# Altium PCB Rackmount_DSP.PcbDoc (part 16 of 24)
Units mil, origin at the board's own origin, x right, y up, seen from the top; angles counter-clockwise.
Board outline 10629.92 x 8267.72 mil, 4 copper layers (Top Layer, Mid Layer 1, Mid Layer 2, Bottom Layer), stack 36.2 mil thick; 4500 components, 1565 nets, 9765 pads, 3289 vias.
Unrouted connection lines stored in the file: 1.
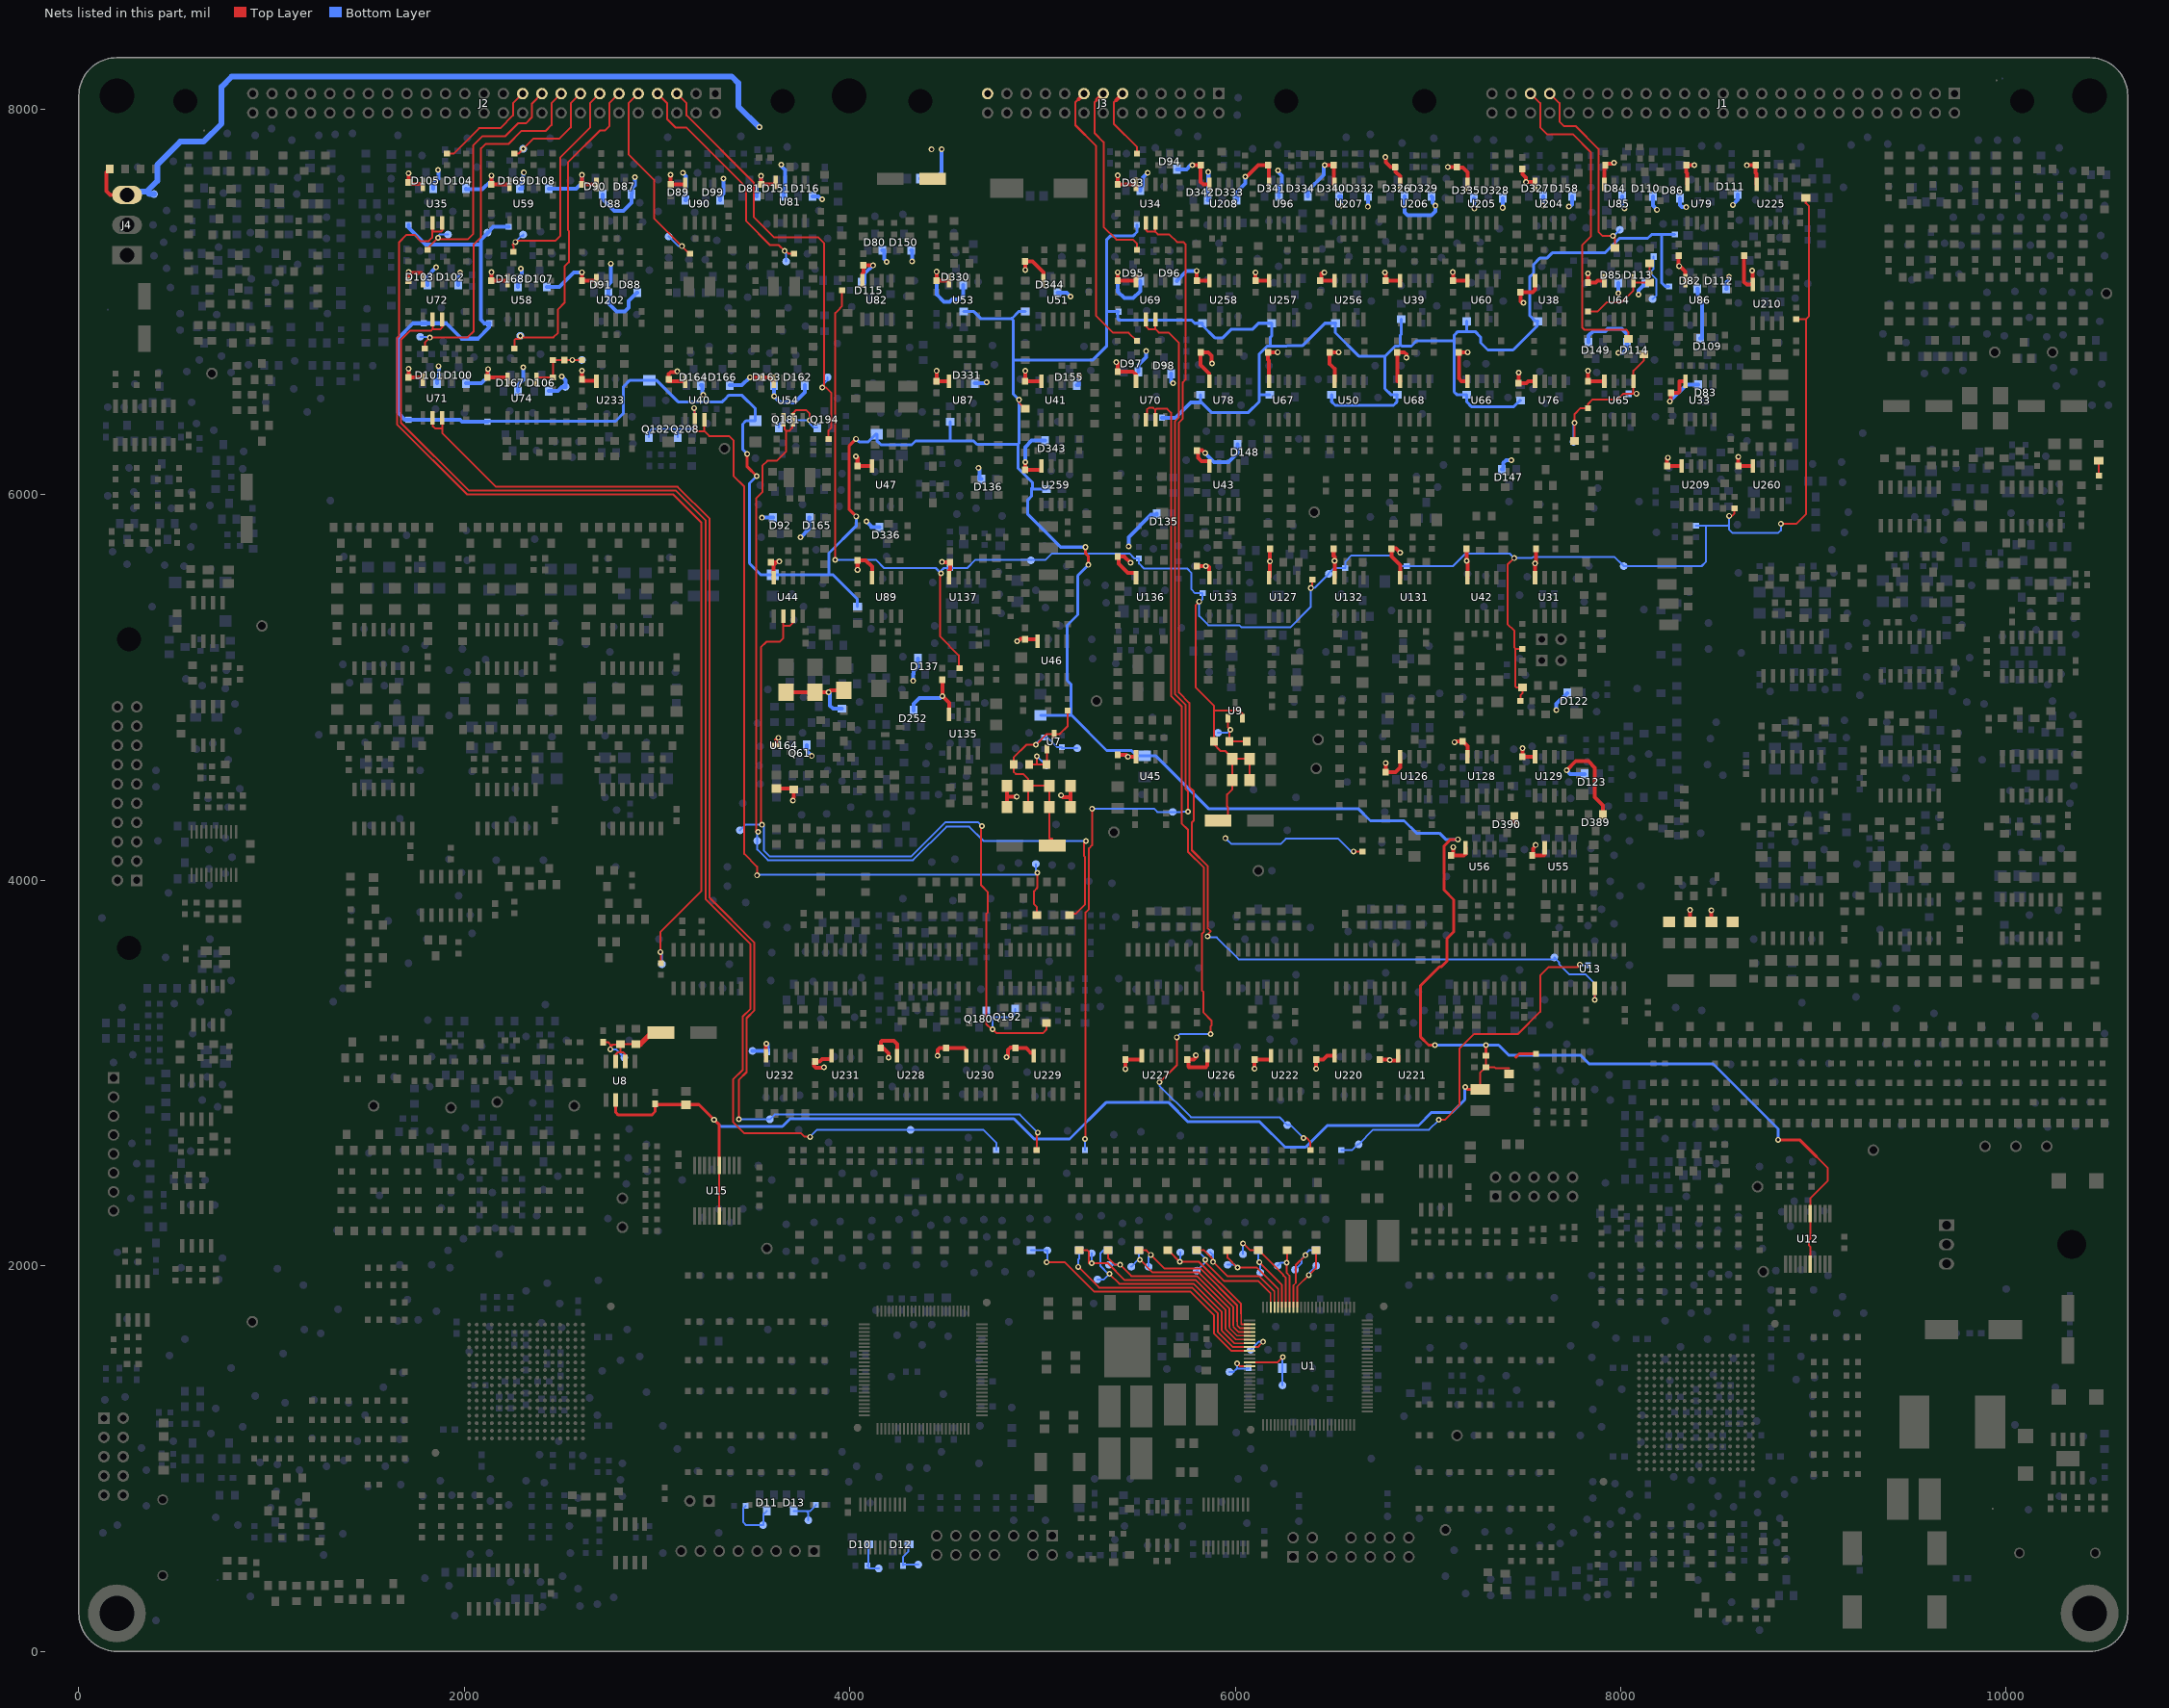
[diagram p18: the nets of this part, all layers, seen from the top]

## Via types
v1: diameter 30, hole 16, Top Layer to Bottom Layer, 3143 vias
v2: diameter 22, hole 12, Top Layer to Bottom Layer, 146 vias

## Nets (pads, with @x,y where several pads share a name; then routed paths per layer and width w, separated by ;. In a path a pad name is that pad's centre, name@x,y a point inside that pad or via, vN(x,y) a via of type N, cw(c..) or ccw(c..) an arc to the next point about the centre after c; other vN are vias at no path point) (continued)
VCC15-: C557.1 C559.1 C561.1 C584.1 C604.1 C606.1 C608.1 C611.1 C613.1 C615.1 C618.1 C623.1 C629.1 C631.1 C632.1 C634.1 C639.1 C640.1 C642.1 C648.1 C657.1 C659.1 C661.1 C663.1 C664.1 C665.1 C666.1 C671.1 C675.1 C676.1 C677.1 C678.1 C695.1 C707.1 C730.2 C734.1 C736.1 C738.1 C740.1 C743.1 C744.1 C745.1 C747.1 C778.2 C830.1 C881.1 C885.1 C917.2 C928.1 C941.1 C956.2 C972.1 C974.1 C976.1 C978.1 C980.1 C982.1 C984.1 C986.1 C988.1 C990.1 C992.1 C995.1 C997.1 C999.1 C1001.1 C1003.1 C1005.1 C1009.1 C1023.1 C1024.1 C1025.1 C1026.1 C1029.1 C1032.1 C1033.1 C1034.1 C1036.1 C1037.1 C1038.1 C1039.1 C1040.1 C1041.1 C1113.1 C1115.1 D80.1 D81.1 D82.1 D83.1 D84.1 D85.1 D86.1 D87.1 D88.1 D89.1 D90.1 D91.1 D92.1 D93.1 D94.1 D95.1 D96.1 D97.1 D98.1 D99.1 D100.1 D101.1 D102.1 D103.1 D104.1 D105.1 D106.1 D107.1 D108.1 D109.1 D110.1 D111.1 D112.1 D113.1 D114.1 D115.1 D116.1 D122.1 D123.1 D135.1 D136.1 D137.1 D147.1 D148.1 D149.1 D150.1 D151.1 D155.1 D158.1 D162.1 D163.1 D164.1 D165.1 D166.1 D167.1 D168.1 D169.1 D252.3 D326.1 D327.1 D328.1 D329.1 D330.1 D331.1 D332.1 D333.1 D334.1 D335.1 D336.1 D340.1 D341.1 D342.1 D343.1 D344.1 D389.1 D390.1 J3.25 J4.3 Q61.2 R963.1 R1107.2 R1108.2 R1109.2 R1110.2 R1280.2 R1404.2 R2088.2 R2094.2 R2095.2 R2096.2 R2097.2 TP1661.1 TP1677.1 TP1737.1 U31.4 U33.4 U34.4 U35.4 U38.4 U39.4 U40.4 U41.4 U42.4 U43.4 U44.4 U45.4 U46.4 U47.4 U50.4 U51.4 U53.4 U54.4 U55.4 U56.4 U58.4 U59.4 U60.4 U64.4 U65.4 U66.4 U67.4 U68.4 U69.4 U70.4 U71.4 U72.4 U74.4 U76.4 U78.4 U79.4 U81.4 U82.4 U85.4 U86.4 U87.4 U88.4 U89.4 U90.4 U96.4 U126.4 U127.4 U128.4 U129.4 U131.4 U132.4 U133.4 U135.4 U136.4 U137.4 U164.3 U202.4 U204.4 U205.4 U206.4 U207.4 U208.4 U209.4 U210.4 U220.4 U221.4 U222.4 U225.4 U226.4 U227.4 U228.4 U229.4 U230.4 U231.4 U232.4 U233.4 U256.4 U257.4 U258.4 U259.4 U260.4 | length 28457.2
  Top Layer w10: v1(7965,7722.73) v1@7968.79,7722.73
  Top Layer w20: R1404.2@160,7690 143.8,7673.8 143.8,7575.47 163.36,7555.91 J4.3@250,7555.91 ; v1(1710,6653.43) C606.1@1710,6610 1785,6610 U71.4@1785,6600 ; C557.1@1710,7110 v1@1710,7150 ; v1(1710,7154.83) v1@1710,7150 ; v1(1710,7668.03) C992.1@1710,7620 1710,7612.5 1785,7612.5 U35.4@1785,7610 ; U72.4@1785,7110 1785,7141.66 1776.66,7150 v1@1710,7150 ; v1(2122.67,6652.69) 2120,6650.02 C941.1@2120,6610 2225,6610 U74.4@2225,6600 ; v1(2140,7154.99) C559.1@2140,7110 U58.4@2225,7110 ; v1(2140,7656.27) C974.1@2140,7610 U59.4@2235,7610 ; v1(2610,6644.3) C561.1@2610,6600 2610,6592.5 2685,6592.5 U233.4@2685,6590 ; v1(2610,7154.6) C995.1@2610,7110 U202.4@2685,7110 ; v1(2610,7659.69) C744.1@2610,7610 U88.4@2685,7610 ; v1(3070,7660.5) C740.1@3070,7610 U90.4@3145,7610 ; v1(3104.84,6640.61) 3101.53,6637.31 3071.65,6637.31 3060,6625.65 C976.1@3060,6600 3060,6590 U40.4@3145,6590 ; v1(3481.29,6610) C988.1@3540,6610 3605,6610 U54.4@3605,6590 ; v1(3540,7654.58) C978.1@3540,7610 3615,7610 U81.4@3615,7620 ; U232.4@3565,3090 3565,3145 3572.5,3152.5 3566.96,3152.5 3566.86,3152.6 v1(3566.62,3152.6) ; C747.1@3590,5650 v1@3620,5650 ; U44.4@3605,5570 3605,5635 v1@3620,5650 ; U164.3@3617.51,4700 3617.51,4727.23 v1(3629.89,4739.61) ; C830.1@3620,4475 3709.85,4475 3709.85,4470 R963.1@3710,4470 3710,4430 3707.28,4427.28 3707.28,4426.11 3705.94,4424.77 3705.94,4415.2 3704.98,4414.24 v1(3704.98,4413.48) ; v1(3633.98,5653.98) 3623.98,5653.98 v1@3620,5650 ; R2088.2@3670,4975 C917.2@3820,4975 v1(3890,4975) 3900,4985 C956.2@3970,4985 ; v1(3865.35,3030.43) 3863.13,3028.21 3824.54,3028.21 3814.52,3038.23 3814.52,3054.44 3820,3059.92 C642.1@3820,3060 3843.5,3060 3856.81,3073.31 3905,3073.31 U231.4@3905,3090 ; v1(4031.76,6199.79) 4040,6191.55 C615.1@4040,6150 U47.4@4115,6150 ; v1(4040,5611.11) C1023.1@4040,5660 4082.17,5660 4115,5627.17 U89.4@4115,5570 ; U82.4@4065,7110 4065,7147.5 4070,7152.5 C736.1@4070,7190 v1(4119.98,7190) ; v1(4201.01,3079.63) 4201.01,3102.52 4173.53,3130 C1036.1@4160,3130 4160,3161.38 4166.86,3168.24 4227.78,3168.24 4245,3151.02 U228.4@4245,3090 ; v1(4450,6643.17) C980.1@4450,6590 U87.4@4515,6590 ; v1(4450,7157.73) C1032.1@4450,7110 U53.4@4515,7110 ; v1(4454.62,3089.99) 4455.45,3089.99 4455.45,3119.34 4466.11,3130 C1039.1@4500,3130 4500.69,3129.31 4592.81,3129.31 4605,3117.12 U230.4@4605,3090 ; v1(4478.45,5651.41) 4479.85,5650 C613.1@4520,5650 4520,5612.5 4515,5607.5 U137.4@4515,5570 ; C1038.1@4480,5040 v1(4480,4954.99) 4515,4919.99 U135.4@4515,4860 ; v1(4813.59,3082.88) 4821.64,3082.88 4821.64,3119.53 4834.18,3132.08 4860,3132.08 C984.1@4860,3130 4915,3130 4938.67,3106.33 4955,3106.33 U229.4@4955,3090 ; R1109.2@4815,4380 4815,4434.01 ; R1110.2@4815,4490 4815,4434.01 ; v1(4866.59,4434.01) 4815,4434.01 ; v1(4867.41,5240.83) 4872.33,5240.83 4885.31,5253.81 4910,5253.81 C618.1@4910,5250 4975,5250 U46.4@4975,5240 ; v1(4909.9,6169.81) 4910,6169.81 C1034.1@4910,6130 4995,6130 U259.4@4995,6150 ; v1(4910,6643.19) C695.1@4910,6590 U41.4@4995,6590 ; v1(4910,7166.99) C1033.1@4910,7210 4948.22,7210 5005,7153.22 U51.4@5005,7110 ; v1(5096.26,4441.42) 5105.32,4432.36 5145,4432.36 ; R1108.2@5145,4380 5145,4432.36 ; R1107.2@5145,4490 5145,4432.36 ; v1(5382.37,6688.08) 5390,6680.45 C1026.1@5390,6640 5468.53,6640 5485,6623.53 U70.4@5485,6590 ; C611.1@5390,4650 5434.75,4650 v1(5443.23,4641.52) 5444.75,4640 U45.4@5485,4640 ; C1041.1@5390,5680 C1041.1@5396,5680 ; v1(5390,7154.25) C997.1@5390,7110 U69.4@5485,7110 ; v1(5390,7656.95) C734.1@5390,7610 U34.4@5485,7610 ; v1(5430,3021.02) C1009.1@5430,3070 5514.71,3070 5514.71,3090 U227.4@5515,3090 ; v1(5456.39,5647.84) 5426,5678.24 5426,5680 C1041.1@5396,5680 ; U136.4@5485,5570 5485,5595 5442.97,5595 5396,5641.97 C1041.1@5396,5680 ; C629.1@5750,3070 C629.1@5756,3070 ; v1(5777.26,7710) C639.1@5820,7710 5820,7623.5 5833.5,7610 U208.4@5865,7610 ; v1(5795.37,3092.3) 5798.89,3088.78 5798.89,3085.05 5783.84,3070 C629.1@5756,3070 ; C1005.1@5800,5630 v1(5846.58,5630) 5860,5630 5865,5625 U133.4@5865,5570 ; v1(5800,7161.99) C745.1@5800,7110 U258.4@5865,7110 ; v1(5843.23,6217.29) 5841.21,6217.29 5825.88,6232.62 5806,6232.62 C584.1@5806,6230 ; U226.4@5855,3090 5855,3039.03 5846.15,3030.18 5760.73,3030.18 5756,3034.91 C629.1@5756,3070 ; U43.4@5865,6150 5865,6175 5823.5,6175 5806,6192.5 C584.1@5806,6222.5 ; U78.4@5865,6590 5865,6627.89 5820,6672.89 C678.1@5820,6740 5859.3,6740 5877.15,6722.15 5877.15,6687.14 5879.16,6685.13 v1(5879.16,6681.51) ; v1(6051.81,7649.84) 6059.84,7649.84 6120,7710 C657.1@6170,7710 6175,7710 U96.4@6175,7610 ; v1(6100,3023.39) C1037.1@6100,3070 6185,3070 U222.4@6185,3090 ; v1(6105.08,7153.44) C661.1@6105.08,7110 U257.4@6175,7110 ; U127.4@6175,5570 6180,5575 v1(6180,5655.54) C675.1@6180,5720 ; U67.4@6175,6590 6175,6697.5 6170,6702.5 C659.1@6170,6740 6219.86,6740 v1(6220.19,6739.67) ; v1(6420,3022.13) C743.1@6420,3070 6456,3070 6476,3090 U220.4@6515,3090 ; C640.1@6440,7110 C640.1@6447.5,7110 ; v1(6462.47,7152.82) 6452.82,7152.82 6447.5,7147.5 C640.1@6447.5,7110 ; v1(6463.82,7710.94) 6464.76,7710 C623.1@6510,7710 6511.66,7710 6511.66,7610 U207.4@6515,7610 ; C1001.1@6510,5720 6510,5682.5 6515,5677.5 v1(6515,5656.89) U132.4@6515,5570 ; U50.4@6515,6590 6515,6653.95 6490,6678.95 C999.1@6490,6740 6490,6740.09 v1(6536.09,6740.09) ; U256.4@6515,7110 C640.1@6447.5,7110 ; C990.1@6750,3070 6795.93,3070 v1@6800.59,3065.34 ; v1(6775.58,7153.04) 6780,7148.62 C1003.1@6780,7110 U39.4@6855,7110 ; v1(6778.59,7752.02) 6780.23,7752.02 6780.23,7726.25 6806.48,7700 C1025.1@6830,7700 6831.78,7698.22 6831.78,7676.57 6855,7653.35 U206.4@6855,7610 ; v1(6780,4609.26) C648.1@6780,4560 6830,4560 6855,4585 U126.4@6855,4640 ; v1(6802.01,3067.76) 6802.01,3065.34 v1@6800.59,3065.34 ; U221.4@6845,3090 6845,3065 6800.93,3065 v1@6800.59,3065.34 ; U131.4@6855,5570 6855,5634.61 6850.48,5639.13 6850.48,5640.15 6810,5680.63 C972.1@6810,5720 6810,5721.98 6833.31,5721.98 v1(6855.05,5700.24) ; U68.4@6855,6590 6840.3,6590 6840.3,6700.66 6840,6700.96 C986.1@6840,6740 6876,6740 6887.48,6728.52 v1(6887.48,6712.12) ; v1(7102.29,7700) C982.1@7150,7700 7150,7697.04 7180.86,7697.04 7205,7672.91 U205.4@7205,7610 ; C885.1@7120,4130 7120,4137.5 C885.1@7131.24,4137.5 ; v1(7127.72,7155) 7127.72,7149.78 7130,7147.5 C1024.1@7130,7110 U60.4@7205,7110 ; v1(7130.96,4172.61) 7131.24,4172.33 C885.1@7131.24,4137.5 ; v1(7137,4717) 7140,4720 C676.1@7180,4720 7205,4695 U128.4@7205,4640 ; U56.4@7195,4170 7195,4136.76 7186.23,4127.99 7131.24,4127.99 C885.1@7131.24,4137.5 ; C608.1@7200,5720 v1(7200,5657.41) 7205,5652.41 U42.4@7205,5570 ; U66.4@7205,6590 7173.5,6590 7160,6603.5 C634.1@7160,6740 v1(7205.53,6740) ; D390.1@7447.5,4331.5 7447.5,4299.02 7457.92,4288.6 v1(7457.92,4282.94) ; v1(7470,6634.33) C707.1@7470,6580 7509.75,6580 7519.75,6590 U76.4@7555,6590 ; v1(7490,4685.13) C1029.1@7490,4640 U129.4@7555,4640 ; C928.1@7490,7690 7490,7661.78 7507.01,7644.77 7507.01,7621.99 v1(7508.66,7621.99) 7555,7621.99 U204.4@7555,7610 ; v1(7495,6995.61) 7487.25,6995.61 7480,7002.85 C671.1@7480,7050 7541.98,7050 7555,7063.02 U38.4@7555,7110 ; C1113.1@7540,4130 C1113.1@7544.29,4130 ; U31.4@7555,5570 v1(7555,5644.27) 7560,5644.27 C632.1@7560,5720 ; v1(7558.63,4183.09) 7552.81,4177.27 7552.81,4172.91 7544.29,4164.39 C1113.1@7544.29,4130 ; U55.4@7605,4170 7605,4133.99 7601.01,4130 C1113.1@7544.29,4130 ; v1(7719.09,4570.5) 7766.25,4617.67 7831.71,4617.67 7864.97,4584.4 7864.97,4432.43 7907.5,4389.9 D389.1@7907.5,4341.5 ; v1(7830,6642.85) C677.1@7830,6590 U65.4@7915,6590 ; v1(7830,7148.94) C666.1@7830,7100 7869.75,7100 7879.75,7110 U64.4@7915,7110 ; U85.4@7915,7610 7915,7690.3 7920,7695.3 C664.1@7920,7710 7920,7717.5 7963.56,7717.5 v1@7968.79,7722.73 ; v1(8244.93,6193.04) 8240,6188.11 C604.1@8240,6150 U209.4@8315,6150 ; v1(8254.86,6485.38) 8260,6490.52 C663.1@8260,6530 8296,6530 8303.5,6537.5 8303.5,6590 U33.4@8335,6590 ; C665.1@8300,7240 8300,7190.01 v1(8302.97,7187.04) 8305.83,7187.04 8335,7157.86 U86.4@8335,7110 ; U79.4@8345,7610 8345,7667.5 8340,7672.5 C738.1@8340,7710 v1(8382.08,7710) ; R2095.2@8360,3785 v1(8360,3845.65) ; R2096.2@8470,3785 v1(8470,3843.69) ; v1(8610,6197.23) C1040.1@8610,6150 U260.4@8685,6150 ; C1115.1@8640,7240 8640,7103.5 8653.5,7090 U210.4@8685,7090 8685,7161.22 v1(8682.19,7164.03) ; v1(8654.21,7709.3) 8653.51,7710 C881.1@8700,7710 8700,7670 8705,7665 U225.4@8705,7610 ; C584.1@5806,6222.5 C584.1@5806,6230 ; C584.1@5806,6222.5 5800,6222.5 C584.1@5800,6230 C584.1@5806,6230
  Bottom Layer w10: v1(5859.58,7674.7) v1@5860.66,7674.7 ; v1(6687.5,7494.89) 6683.63,7498.75 v1@6687.5,7498.75
  Bottom Layer w20: D103.1@1807.5,7088.5 1807.5,7133.78 v1(1853.91,7180.2) ; D105.1@1837.5,7588.5 1837.5,7612.22 1865.51,7640.23 1865.51,7684.98 v1(1864.19,7684.98) ; D101.1@1857.5,6578.5 1857.5,6596.13 1869.11,6607.74 1869.11,6667.48 v1(1865.56,6667.48) ; D102.1@1967.5,7088.5 1967.5,7137.22 1970,7139.72 1970,7145.14 v1(1977.66,7152.8) ; D100.1@2007.5,6578.5 2089.34,6578.5 2122.67,6611.83 v1(2122.67,6652.69) ; D104.1@2007.5,7588.5 2007.5,7584.78 2093.66,7584.78 2140,7631.12 v1(2140,7656.27) ; D167.1@2277.5,6538.5 2277.5,6570.05 2305,6597.55 v1(2305,6662.15) ; D168.1@2277.5,7078.5 2277.5,7121.28 2298.86,7142.64 2298.86,7166.07 2294.66,7166.07 2294.66,7172.95 v1(2293.34,7172.95) ; D169.1@2287.5,7588.5 2300.4,7588.5 2300.4,7632 2305.41,7637.01 2305.41,7672.01 v1(2309.24,7672.01) ; D107.1@2427.5,7078.5 2492.27,7078.5 2568.38,7154.6 v1(2610,7154.6) ; D106.1@2437.5,6538.5 2484.51,6538.5 2505.3,6559.29 2505.3,6560 TP1737.1@2525,6560 2525,6595.06 v1(2505.3,6614.76) ; D108.1@2437.5,7588.5 2581.04,7588.5 2610,7617.46 v1(2610,7659.69) ; D90.1@2717.5,7558.5 2717.5,7533.31 2778,7472.81 2825.31,7472.81 2867.5,7515 D87.1@2867.5,7558.5 2867.5,7559.97 2870.18,7562.65 2870.18,7589.29 2885.58,7604.69 v1(2885.58,7647.69) ; v1(2759.97,7199.62) 2759.97,7102.8 2747.5,7090.33 D91.1@2747.5,7048.5 2747.5,6993.65 2789.77,6951.38 2832.44,6951.38 2852.95,6971.88 2852.95,7005.48 2895.97,7048.5 D88.1@2897.5,7048.5 ; v1(3133.52,7670.13) 3150,7653.64 3150,7528.5 D89.1@3147.5,7528.5 ; D164.1@3227.5,6568.5 3234.14,6568.5 3234.14,6525 v1@3239.27,6519.87 ; D99.1@3327.5,7528.5 3327.5,7546.18 3343.96,7562.64 v1(3343.96,7640) ; D166.1@3377.5,6568.5 3439.46,6568.5 3480.96,6610 v1(3481.29,6610) ; TP1661.1@3495,3115 3565,3115 C631.1@3570,3110 3570,3114.83 3573.25,3118.09 3573.25,3149 3570.46,3149 3566.86,3152.6 v1(3566.62,3152.6) ; D81.1@3517.5,7548.5 3517.5,7594.54 3540,7617.04 v1(3540,7654.58) ; v1(3544.89,5881.5) D92.1@3602.5,5881.5 ; D163.1@3607.5,6568.5 v1(3607.5,6512.14) 3639.97,6479.67 3714.65,6479.67 3767.5,6532.52 D162.1@3767.5,6568.5 ; v1(3643.81,7713.1) 3641.57,7710.86 3641.57,7710 3641.57,7707.58 3663.66,7685.49 3663.66,7585.31 3657.5,7579.16 D151.1@3657.5,7548.5 ; v1(3743.43,5779.27) 3743.43,5778.19 3789.93,5824.69 3789.93,5881.5 D165.1@3792.5,5881.5 ; Q61.2@3777.5,4701.5 3777.5,4671.45 3802.5,4646.45 v1(3802.5,4644.9) ; D116.1@3807.5,7548.5 3835.64,7548.5 3851.36,7532.79 v1(3856.2,7532.79) ; v1(3890,4975) 3896.92,4968.08 3896.92,4905.79 3912.72,4890 R1280.2@3960,4890 ; D115.1@4062.5,7101.5 4074.98,7101.5 4074.98,7145 v1(4119.98,7190) ; v1(4085.73,5862.26) 4110.48,5837.51 4110.48,5833.52 4112.5,5831.5 D336.1@4152.5,5831.5 ; D80.1@4167.5,7268.5 4177.5,7268.5 4177.5,7222.76 v1(4191.47,7208.8) ; D150.1@4317.5,7268.5 4323.02,7268.5 4323.02,7211.34 v1(4322.33,7211.34) ; v1(4328.89,5034.69) 4328.89,5069.69 4330.71,5071.5 4330.71,5086.21 4352.5,5108 D137.1@4352.5,5151.5 ; D252.3@4330,4881.5 4330,4916.04 4360.4,4946.45 4469.21,4946.45 4477.76,4954.99 v1(4480,4954.99) ; C730.2@4365,7640 4444.72,7640 4476.78,7672.07 v1(4476.78,7792.29) ; v1(4450,7157.73) 4450,7039.8 4489.19,7000.62 4518.18,7000.62 4531.62,7014.06 4568.58,7014.06 4587.5,7032.97 D330.1@4587.5,7088.5 ; D331.1@4647.5,6578.5 4703.49,6578.5 v1(4709.78,6584.79) ; v1(4667.14,6139.86) 4666.86,6139.86 4666.58,6139.58 4663.65,6139.58 4672.5,6130.73 4672.5,6081.5 D136.1@4682.5,6081.5 ; v1(4909.9,6169.81) 4910,6169.91 4910,6247.66 4943.5,6281.16 5012.5,6281.16 D343.1@5012.5,6281.5 ; D344.1@5077.5,7048.5 5124.82,7048.5 v1(5145.18,7028.14) ; D155.1@5177.5,6568.5 5187.5,6568.5 5187.5,6614.12 v1(5190.66,6617.29) ; v1(5390,7154.25) 5390,7054.68 5424.3,7020.38 5470.97,7020.38 5507.5,7056.91 D95.1@5507.5,7108.5 ; v1(5446.16,5732.9) 5446.16,5779.66 5563.05,5896.56 5592.5,5896.56 D135.1@5592.5,5901.5 ; D97.1@5497.5,6638.5 5497.5,6674.03 5537.28,6713.81 v1(5537.28,6745.3) ; D93.1@5507.5,7578.5 5507.5,7591.46 5520.78,7604.74 5520.78,7645.25 v1(5545.53,7670) ; D98.1@5667.5,6628.5 5667.5,6585 5673.99,6578.51 v1(5677.62,6578.51) ; D96.1@5697.5,7108.5 5697.5,7112 5747.49,7161.99 v1(5800,7161.99) ; D94.1@5697.5,7688.5 5746.35,7688.5 5767.85,7710 v1(5777.26,7710) ; v1(5843.23,6217.29) 5867.97,6192.54 5867.97,6191.24 5889.22,6170 5964.5,6170 6012.5,6218 D148.1@6012.5,6261.5 ; D342.1@5857.5,7528.5 5860.66,7528.5 v1@5860.66,7674.7 ; D333.1@6007.5,7528.5 6009.07,7528.5 6009.07,7571.58 6051.81,7614.33 v1(6051.81,7649.84) ; v1(6221.57,7683) 6221.57,7675.98 6241.36,7656.19 6241.36,7611.08 6227.5,7597.22 D341.1@6227.5,7548.5 ; D334.1@6377.5,7548.5 6377.5,7577.34 6459.41,7659.25 6459.41,7700.87 6463.82,7705.29 v1(6463.82,7710.94) ; D340.1@6537.5,7548.5 6547.5,7548.5 6547.5,7501.86 v1(6549.4,7499.96) ; v1@6687.5,7498.75 D332.1@6687.5,7548.5 ; D326.1@6877.5,7548.5 6877.5,7466.13 6892.31,7451.32 7018.41,7451.32 7038.12,7471.03 v1(7038.12,7499.54) 7022.63,7515.03 7022.63,7543.37 D329.1@7017.5,7548.5 ; D335.1@7237.5,7538.5 7237.5,7487.98 v1(7241.05,7484.43) ; D147.1@7382.5,6131.5 7391.25,6131.5 7391.25,6165.74 7405.52,6180 v1(7431.89,6180) ; v1(7386.7,7489.4) 7384.7,7487.41 7384.7,7491.58 7387.5,7494.38 D328.1@7387.5,7538.5 ; D327.1@7597.5,7548.5 7597.5,7500.18 v1(7597.81,7499.87) ; v1(7666.2,4883.19) 7666.2,4915.2 D122.1@7722.5,4971.5 ; v1(7719.09,4570.5) 7738.09,4551.5 D123.1@7812.5,4551.5 ; v1(7731.1,7495.48) 7737.98,7495.48 7747.5,7505 D158.1@7747.5,7548.5 ; D149.1@7832.5,6791.5 7832.5,6825.41 7856.68,6849.59 7919.66,6849.59 7932.25,6862.18 8005.32,6862.18 8032.5,6835 D114.1@8032.5,6791.5 8032.5,6758.09 8011.49,6737.08 v1(7987.14,6737.08) ; v1(7987.5,7046.11) D85.1@7987.5,7098.5 ; D84.1@8007.5,7548.5 8007.5,7496.97 v1(8018.63,7485.84) ; v1(8092.66,7039.11) 8092.66,7060.16 8127.5,7095 D113.1@8127.5,7098.5 ; D110.1@8167.5,7548.5 8167.5,7499.94 v1(8188.19,7479.25) ; v1(8254.86,6485.38) 8340.98,6571.5 D83.1@8402.5,6571.5 ; D86.1@8307.5,7538.5 8307.5,7502.5 8317.94,7492.06 v1(8340.03,7492.06) ; D82.1@8397.5,7068.5 8398.33,7068.5 8398.33,7031.36 8412.77,7016.92 v1(8412.77,7015.57) 8422.5,7005.84 8422.5,6811.5 D109.1@8412.5,6811.5 ; D112.1@8547.5,7068.5 8550.2,7068.5 8550.2,7103.49 8561,7114.29 v1(8561,7130.55) ; v1(8580.97,7504.35) 8607.5,7530.88 D111.1@8607.5,7558.5 ; v1@3239.27,6519.87 3239.99,6519.87 v1(3240.11,6519.76) 3239.38,6519.76 v1@3239.27,6519.87
  Bottom Layer w30: J4.3@250,7555.91 250,7574.02 352.5,7574.02 ; TP1677.1@390,7560 366.52,7560 352.5,7574.02 ; v1(3530.62,7908.27) 3527.98,7908.27 3421.19,8015.06 3421.19,8136.32 3387.77,8169.74 838.9,8169.74 838.64,8170 793.04,8170 740.11,8117.07 740.11,7925.09 646.92,7831.91 525.93,7831.91 406.55,7712.52 406.55,7628.07 352.5,7574.02
  other v1: 4424.3,7791.86
VCHG+: J1.43 R799.1 TP812.1 | length 1058.3
  Top Layer w10: J1.43@7631.5,8081.5 7681.5,8031.5 7681.5,7936.24 7704.11,7913.63 7764.94,7913.63 7884.09,7794.47 7884.09,7363.91 7904.52,7343.49 v1(7958.99,7343.49) 7970,7332.48 R799.1@7970,7280
  Bottom Layer w10: v1(7958.99,7343.49) 7961.42,7345.92 7965.92,7345.92 TP812.1@7995,7375
VCHG-: J1.45 R836.1 TP813.1 | length 1727.4
  Top Layer w10: J1.45@7531.5,8081.5 7581.5,8031.5 7581.5,7906.45 7617.31,7870.64 7751.36,7870.64 7844.09,7777.9 7844.09,7340.45 7799,7295.35 7799,6868.79 7811.62,6856.17 8027.91,6856.17 8039.08,6845 8039.08,6810 R836.1@8040,6810
  Bottom Layer w10: TP813.1@7530,8080 J1.45@7531.5,8081.5
VIN_A: TP403.1 U13.13 U34.6 U34.7 | length 6281.5
  Top Layer w10: U34.6@5535,7410 5535,7375.29 5544.84,7365.44 5585,7365.44 ; U34.7@5585,7410 5585,7365.44 ; v1(5856,3708.95) 5856,3718.95 5872.21,3735.17 5857.5,3749.88 5857.5,4073.62 5774.44,4156.68 5774.44,4299.17 5784.44,4309.17 5784.44,4461.08 5761.31,4484.21 5761.31,4920.45 5707.45,4974.31 5707.45,6374.6 5727.62,6394.76 5727.62,6583.55 5741,6596.93 5741,7300.55 5730.38,7311.17 5697.46,7311.17 5656.76,7351.87 5597.43,7351.87 5585,7364.3 5585,7365.44 ; U13.13@7865,3440 7865,3379.75 v1(7865.4,3379.75)
  Bottom Layer w10: v1(5856,3708.95) 5859.95,3708.95 5865.14,3703.77 5903.41,3703.77 6017.06,3590.11 7655,3590.11 TP403.1@7655,3600 7679.75,3575.25 7679.75,3564.94 7733.2,3511.5 7818,3511.5 7865.4,3464.1 v1(7865.4,3379.75)
VIN_A/ADREF: R903.1 R926.2 TP1608.1 | length 1962.6
  Top Layer w10: v1(7056.39,2757.61) 7086.39,2757.61 7162.75,2833.98 7162.75,2970.93 7162.66,2971.02 7162.66,3125.5 7240.33,3203.17 7467.88,3203.17 7582.41,3317.69 7582.41,3505.17 7627.24,3550 7776.79,3550 7786.75,3559.96 v1(7786.75,3562.99)
  Bottom Layer w10: R903.1@6550,2600 6604.43,2600 6634.43,2630 TP1608.1@6640,2630 6715.8,2705.8 7004.57,2705.8 v1(7056.39,2757.61) ; v1(7786.75,3562.99) 7789.75,3560 R926.2@7830,3560
VIN_B: R907.1 TP401.1 U69.6 U69.7 | length 5054.6
  Top Layer w10: v1(5220.78,2658.14) 5222.74,2658.14 5222.74,3833.16 5240.22,3850.63 5240.22,4165.37 5256.72,4181.87 v1(5256.72,4371.48) ; U69.6@5535,6910 5535,6875.41 5550.81,6859.6 5585,6859.6 5585,6860 ; U69.7@5585,6910 5585,6860 ; v1(5754.44,4356.01) 5754.44,4462.8 5741.31,4475.93 5741.31,4911.5 5687.45,4965.36 5687.45,6382.88 5707.62,6403.05 5707.62,6787.59 5653.34,6841.87 5603.13,6841.87 5585,6860
  Bottom Layer w10: R907.1@5220,2600 5220,2657.36 v1(5220.78,2658.14) ; v1(5256.72,4371.48) 5579.24,4371.48 5595.71,4355 TP401.1@5675,4355 5723.43,4355 5724.44,4356.01 v1(5754.44,4356.01)
VIN_C: R929.2 TP400.1 U70.6 U70.7 | length 4995.8
  Top Layer w10: U70.6@5535,6390 5541.5,6390 5541.5,6442.05 5550.98,6451.54 5573.46,6451.54 5585,6440 ; U70.7@5585,6390 5585,6440 ; v1(5606.05,2952.96) 5608.57,2952.96 5695.85,3040.25 v1(5695.85,3185.86) ; v1(5872.13,3201.88) 5872.13,3242.97 5876.73,3247.57 5876.73,3272.43 5835.14,3314.02 5835.14,3420.17 5826,3429.31 5826,3721.83 5837.5,3733.33 5837.5,4065.33 5754.44,4148.39 5754.44,4262.33 5721.31,4295.46 5721.31,4903.21 5666.5,4958.02 5666.5,6426.21 5646.86,6445.86 5590.86,6445.86 5585,6440 ; v1(6353.39,2663.25) 6369.2,2663.25 6390,2642.45 R929.2@6390,2600
  Bottom Layer w10: v1(5606.05,2952.96) 5606.05,2934.72 5769.86,2770.91 6229.09,2770.91 TP400.1@6270,2730 6286.64,2730 v1(6353.39,2663.25) ; v1(5695.85,3185.86) 5711.88,3201.88 v1(5872.13,3201.88)
Vin_R: J3.11 R801.1 TP818.1 | length 388.3
  Top Layer w10: 5381.58,8048.12 5369.96,8036.5 5369.96,7924 5490,7803.97 R801.1@5490,7770
  Top Layer w20: 5381.58,8048.12 J3.11@5414.96,8081.5
  Bottom Layer w10: TP818.1@5410,8085 5410,8081.5 J3.11@5414.96,8081.5
Vin_S: J3.13 R805.1 TP819.1 | length 977.5
  Top Layer w10: 5282.4,8048.94 5269.96,8036.5 5269.96,7876.96 5317.04,7829.88 5317.04,7389.96 5383.15,7323.85 5468.03,7323.85 5490,7301.89 R805.1@5490,7270
  Top Layer w20: 5282.4,8048.94 J3.13@5314.96,8081.5
  Bottom Layer w10: TP819.1@5310,8080 5310,8081.5 J3.13@5314.96,8081.5
Vin_T: J3.15 R809.1 TP820.1 | length 1482.9
  Top Layer w10: 5186.5,8053.04 5169.96,8036.5 5169.96,7917.69 5277.04,7810.61 5277.04,6929.96 5366.05,6840.96 5446.55,6840.96 5487.51,6800 R809.1@5490,6800
  Top Layer w20: 5186.5,8053.04 J3.15@5214.96,8081.5
  Bottom Layer w10: TP820.1@5215,8080 J3.15@5214.96,8081.5
VINV_A: R889.1 TP408.1 U71.6 U71.7 | length 6690.5
  Top Layer w10: U71.6@1835,6400 1837.13,6400 1837.13,6354.7 1847.29,6344.55 1885,6344.55 ; U71.7@1885,6400 1885,6344.55 ; v1(3423.71,2760.01) 3423.71,2964.74 3464.29,3005.31 3464.29,3285.01 3505,3325.73 3505,3676.82 3272.41,3909.41 3272.41,5874.96 3106.31,6041.06 2163.6,6041.06 1885,6319.66 1885,6344.55 ; R889.1@4970,2600 4970,2686.63 v1(4975.03,2691.67)
  Bottom Layer w10: v1(3423.71,2760.01) 3549.99,2760.01 TP408.1@3585,2760 3610,2785 4881.7,2785 v1(4975.03,2691.67)
VINV_B: R931.1 TP407.1 U72.6 U72.7 | length 7289.8
  Top Layer w10: U72.6@1835,6910 1835,6860 ; U72.7@1885,6910 1885,6869.55 1873.97,6858.52 1835,6858.52 1835,6860 ; v1(3794.71,2669.28) 3794.71,2669.97 3764.71,2669.97 3747.14,2687.54 3453.76,2687.54 3393.71,2747.59 3393.71,2966.19 3444.29,3016.76 3444.29,3293.49 3485,3334.21 3485,3668.53 3252.41,3901.13 3252.41,5866.68 3098.03,6021.06 2024.23,6021.06 1671.18,6374.1 1671.18,6804.42 1717.81,6851.05 1826.05,6851.05 1835,6860
  Bottom Layer w10: v1(3794.71,2669.28) 3794.71,2671.38 3828.33,2705 TP407.1@4315,2705 4693.99,2705 4760,2638.99 R931.1@4760,2600
VINV_C: R932.1 TP817.1 U35.6 U35.7 | length 5600.2
  Top Layer w10: U35.7@1885,7410 1885,7370.51 1879.93,7365.44 1835,7365.44 U35.6@1835,7410 1832.8,7407.8 1832.8,7334.25 1815.23,7316.68 1773.32,7316.68 1741.32,7348.69 1699.41,7348.69 1661.31,7310.59 1661.31,6822.83 1650.96,6812.48 1650.96,6366.04 2015.94,6001.06 3084.85,6001.06 3228.71,5857.2 3228.71,3943.43 3017.09,3731.8 v1(3017.09,3627.94) 3020,3625.03 R932.1@3020,3570
  Bottom Layer w10: v1(3017.09,3627.94) 3025,3620.03 TP817.1@3025,3565
VINV_DC_A: Q180.2 Q192.2 R1206.1 TP406.1 U44.6 U44.7 | length 4443.7
  Top Layer w10: v1(3544.89,4287.76) 3542.84,4289.81 3538.76,4289.81 3538.76,5209.38 3566.79,5237.42 3635.84,5237.42 3655,5256.57 3655,5319.26 ; U44.6@3655,5370 3655,5319.26 ; U44.7@3705,5370 3705,5335.75 3688.52,5319.26 3655,5319.26 ; v1(4685.6,4281.16) 4680.9,4281.16 4680.9,3974.07 4716.73,3938.25 4716.73,3833.67 4708.17,3825.11 4708.17,3254.54 4734.79,3227.92 v1(4740.42,3227.92) 4761.84,3206.5 5001.5,3206.5 5020,3225 R1206.1@5020,3260
  Bottom Layer w10: TP406.1@3430,4260 3459.81,4289.81 v1@3544.89,4289.81 ; v1(3544.89,4287.76) v1@3544.89,4289.81 ; v1(4685.6,4281.16) 4664.39,4302.37 4496.08,4302.37 4318.71,4125 3583,4125 3555,4153 3555,4279.71 v1@3544.89,4289.81 ; Q180.2@4707.5,3321.5 4707.5,3318 4739.61,3285.89 4740.42,3285.89 ; v1(4740.42,3227.92) 4740.42,3285.89 ; Q192.2@4857.5,3331.5 4857.5,3306.99 4840.51,3290 4744.54,3290 4740.42,3285.89
VINV_DC_B: Q181.2 Q194.2 R1208.1 TP405.1 U54.6 U54.7 | length 5139.1
  Top Layer w10: v1(3525,4250.74) 3514.89,4250.74 3514.89,5982.7 3546.34,6014.14 3546.34,6150.33 3572.26,6176.25 3620.96,6176.25 3670,6225.29 3670,6331.5 ; U54.6@3655,6390 3661.5,6390 3661.5,6340 3670,6331.5 ; v1(3792.25,6387.16) 3792.25,6420.46 3772.71,6440 3721.45,6440 3705,6423.55 U54.7@3705,6390 3700.41,6390 3700.41,6347.18 3684.73,6331.5 3670,6331.5 ; R1208.1@5140,3820 5140,3826.03 5171.41,3826.03 5219.5,3874.12 5219.5,4121.73 5214.43,4126.79 5214.43,4203.88 v1(5225.44,4203.88)
  Bottom Layer w10: v1(3525,4250.74) 3525,4252.37 3522.59,4254.78 3522.41,4254.78 3520,4252.37 TP405.1@3520,4205 3520,4159.72 3574.72,4105 4327.93,4105 4501.03,4278.1 4620.16,4278.1 4694.39,4203.88 v1(5225.44,4203.88) ; Q181.2@3632.5,6348.5 3632.5,6367.09 3652.56,6387.16 v1(3792.25,6387.16) 3792.25,6369.2 3812.95,6348.5 Q194.2@3832.5,6348.5
VINV_DC_C: Q182.2 Q208.2 R1189.1 TP1607.1 U40.6 U40.7 | length 4859.7
  Top Layer w10: v1(3192.3,6450.2) 3195,6447.5 U40.6@3195,6390 3195,6346.42 3211.57,6329.85 3245,6329.85 ; U40.7@3245,6390 3245,6329.85 ; v1(3518.42,4025.54) 3518.42,4071.07 3452.41,4137.08 3452.41,6042.05 3397.68,6096.78 3397.68,6280.02 3372.69,6305 3269.71,6305 3245,6329.71 3245,6329.85 ; R1189.1@4970,3820 4970,3862.1 4955.88,3876.22 4955.88,3943.39 4970,3957.5 4970,3959.29 4973,3962.29 v1(4973,4038.79)
  Bottom Layer w10: Q182.2@2957.5,6298.5 2957.5,6324.5 2974.8,6341.8 3093.59,6341.8 3103.13,6332.26 ; Q208.2@3107.5,6298.5 3107.5,6327.89 3103.13,6332.26 ; v1(3192.3,6450.2) 3194.34,6448.16 3194.34,6356.19 3178.81,6340.66 3111.53,6340.66 3103.13,6332.26 ; v1(3518.42,4025.54) 3518.42,4029.21 4961.22,4029.21 v1@4969.93,4037.93 ; TP1607.1@4965,4085 4965,4042.86 v1@4969.93,4037.93 ; v1(4973,4038.79) 4973,4037.16 4971.85,4036.01 v1@4969.93,4037.93
VINVA: J2.17 R815.1 TP814.1 | length 1927
  Top Layer w10: R815.1@1795,6760 1795,6789.48 v1(1820.66,6815.15) 1900.43,6815.15 1901.66,6816.38 1902.23,6816.38 1902.87,6817.02 2017.22,6817.02 2049.09,6848.89 2049.09,7300.14 2086.61,7337.66 2086.61,7797.1 2109.5,7820 2228.15,7820 2294.97,7886.82 2420.36,7886.82 2452.36,7918.82 2452.36,8031.5 J2.17@2502.36,8081.5
  Bottom Layer w10: TP814.1@1770,6820 1820.66,6820 v1(1820.66,6815.15)
VINVB: J2.19 R819.1 TP815.1 | length 1319.8
  Top Layer w10: R819.1@1810,7270 1810,7280.22 1856.3,7326.52 v1@1869.59,7326.52 ; v1(1862.8,7333.31) v1@1869.59,7326.52 ; J2.19@2402.36,8081.5 2350.54,8029.68 2350.54,7958.16 2319.91,7927.53 2278.15,7927.53 2210.61,7860 2092.93,7860 2046.61,7813.67 2046.61,7354.23 2018.9,7326.52 v1@1869.59,7326.52
  Bottom Layer w10: v1(1862.8,7333.31) 1862.8,7342.8 1870,7350 TP815.1@1915,7350
VINVC: J2.21 R823.1 TP816.1 | length 562.8
  Top Layer w10: R823.1@1910,7770 1943.87,7770 2076.37,7902.5 2187.01,7902.5 2252.36,7967.86 2252.36,8031.5 J2.21@2302.36,8081.5
  Bottom Layer w10: J2.21@2302.36,8081.5 2305,8081.5 TP816.1@2305,8080
VOut_A: J2.11 R849.1 TP821.1 | length 1687.5
  Top Layer w10: R849.1@2260,6760 2260,6802.32 2267.46,6809.78 2290,6809.78 v1@2290,6817.13 ; v1(2290,6825) v1@2290,6817.13 ; J2.11@2802.36,8081.5 2752.36,8031.5 2752.36,7912.22 2729.7,7889.56 2702.61,7889.56 2537.41,7724.36 2537.41,7373.82 2541.78,7369.44 2541.78,7207.03 2520.05,7185.29 2520.05,6996.14 2485.82,6961.92 2485.82,6840.85 2462.11,6817.13 v1@2290,6817.13
VOut_A_DC: J2.5 R761.1 TP822.1 | length 2343.7
  Top Layer w10: J2.5@3102.36,8081.5 3152.36,8031.5 3152.36,7967.86 3502.14,7618.08 3502.14,7440.5 3606.31,7336.33 3835.66,7336.33 3867.57,7304.43 v1@3867.57,6556.38 ; v1(3857.47,6556.38) v1@3867.57,6556.38 ; R761.1@3890,6290 3890,6333.45 3903.3,6346.75 3903.3,6530 3876.93,6556.38 v1@3867.57,6556.38
  Bottom Layer w10: v1(3857.47,6556.38) 3864.21,6563.12 3864.21,6575.17 3885,6595.95 TP822.1@3885,6610
VOUT_A_FOR_CROSS: C1232.2 R825.2 R1501.1 R2289.1 TP823.1 U74.1 | length 384.2
  Top Layer w10: U74.1@2375,6600 2375,6610 R1501.1@2460,6610 R825.2@2460,6700 C1232.2@2520,6700 v1(2560.79,6700) R2289.1@2610,6700
  Bottom Layer w10: v1(2560.79,6700) TP823.1@2610,6700
VOut_B: J2.13 R846.1 TP824.1 | length 1192.2
  Top Layer w10: R846.1@2255,7260 2255,7291.95 2250,7296.95 v1(2264.71,7311.66) 2264.71,7317.49 2472.43,7317.49 2497.14,7342.2 2497.14,7748.92 2652.36,7904.14 2652.36,8031.5 J2.13@2702.36,8081.5
  Bottom Layer w10: v1(2264.71,7311.66) 2295.25,7342.2 2303.02,7342.2 2305,7344.18 TP824.1@2305,7350
VOut_B_DC: J2.7 R762.1 TP825.1 | length 1263.1
  Top Layer w10: J2.7@3002.36,8081.5 3052.36,8031.5 3052.36,7948.96 3097.06,7904.26 3152.54,7904.26 3462.14,7594.65 3462.14,7420.29 3586.5,7295.93 3631.25,7295.93 v1(3662.06,7265.13) 3664.65,7267.72 3682.37,7250 R762.1@3710,7250
  Bottom Layer w10: v1(3662.06,7265.13) 3670,7257.18 TP825.1@3670,7210
VOut_C: J2.15 R848.1 TP826.1 | length 545.9
  Top Layer w10: R848.1@2260,7770 2280.58,7770 2304.47,7793.88 2305,7793.88 v1(2305,7795) 2306.79,7795 2306.79,7795.99 2357.39,7846.59 2492.54,7846.59 2552.36,7906.41 2552.36,8031.5 J2.15@2602.36,8081.5
VOut_C_DC: J2.9 R763.1 TP827.1 | length 1077.1
  Top Layer w10: J2.9@2902.36,8081.5 2852.12,8031.25 2852.12,7766.28 2984.01,7634.39 2984.01,7434.66 v1(3128.67,7290) 3133.98,7290 3133.98,7285.02 3169,7250 R763.1@3170,7250
  Bottom Layer w10: TP827.1@3060,7340 3110,7290 v1(3128.67,7290)
VOV_BAT+: C1241.2 R1488.1 R1537.1 R1987.2 TP828.1 U64.1 | length 766.7
  Top Layer w10: R1537.1@7830,6950 7878.3,6950 7928.01,6999.7 8004.7,6999.7 8065,7060 U64.1@8065,7100 ; U64.1@8065,7110 U64.1@8065,7100 ; R1987.2@8150,7200 v1(8150,7151.33) R1488.1@8150,7100 U64.1@8065,7100
  Bottom Layer w10: TP828.1@8165,7015 8185.12,7035.12 8185.12,7116.22 v1(8150,7151.33) 8170,7171.33 C1241.2@8170,7235
VOV_BAT-: C1244.2 R1489.1 R1538.1 R1989.2 TP829.1 U65.1 | length 886.6
  Top Layer w10: R1489.1@7760,6280 v1(7760,6373.29) 7760,6418.84 7791.16,6450 R1538.1@7830,6450 7830,6470.99 7852.22,6493.21 7981.66,6493.21 8012.63,6524.18 8064.8,6524.18 ; v1(8081.17,6525) 8074.27,6525 8073.45,6524.18 8064.8,6524.18 ; R1989.2@8120,6730 8120,6698.16 8065,6643.16 U65.1@8065,6590 8064.8,6590 8064.8,6524.18
  Bottom Layer w10: TP829.1@7755,6275 7755,6368.29 v1(7760,6373.29) ; C1244.2@8040,6525 v1(8081.17,6525)
VREF3V: C300.1 C301.1 C338.1 C728.1 C771.1 C907.1 R1319.1 R1498.2 R1499.2 R1500.2 R1523.2 R1548.2 R1564.2 R1570.2 R1571.2 R1577.2 R1578.2 R1579.2 R1728.2 R1843.2 R1848.2 R1849.2 R1850.2 R1851.2 R1852.2 R2294.2 R2298.2 R2302.2 R2307.2 R2312.2 R2384.1 R2385.1 R2386.1 R2387.1 R2388.1 R2389.1 R2390.1 R2391.1 R2392.1 R2393.1 R2394.1 R2395.1 TP410.1 U8.6 U12.6 U12.15 U15.6 U15.15 | length 31143.9
  Top Layer w10: U15.6@3322.8,2258.7 U15.15@3322.8,2521.3 ; v1(4878.02,6492.96) 4876.89,6491.83 4876.89,6477.61 4907.5,6447 R1728.2@4910,6447 ; C771.1@7270,2915 7270,3001.5 7298.5,3030 C300.1@7300,3030 ; C301.1@7300,3090 C300.1@7300,3030 ; 7420,3025 7351.25,3025 7346.25,3030 C300.1@7300,3030 ; U12.6@8982.8,2008.7 8982.8,2099.67 8975.57,2106.89 8975.57,2131.75 8982.8,2138.97 U12.15@8982.8,2271.3 8982.8,2350.58 9072.48,2440.26 9072.48,2509.18 9015.15,2566.51
  Top Layer w15: U8.6@2785,2860 2785,2796.3 2799.18,2782.12 2972.2,2782.12 2990,2799.92 C728.1@2990,2836.62 ; C728.1@2990,2840 C728.1@2990,2836.62 ; C907.1@3150,2835 C907.1@3150,2836.62 ; U15.15@3322.8,2521.3 3322.8,2731.31 v1(3295.78,2758.33) 3217.49,2836.62 C907.1@3150,2836.62 ; v1(3467.68,6211.31) 3467.68,6145.42 v1(3516.34,6096.76) ; v1(4032.46,6290.43) 3997.43,6255.4 3997.43,5923.45 v1(4032.74,5888.14) ; v1(5223.23,5728.68) 5223.23,5696.18 5237.77,5681.65 v1(5237.77,5636.43) ; v1(7035.75,3145.48) 7003.25,3145.48 6959.75,3188.98 6959.75,3452.19 7060.07,3552.5 7069.75,3552.5 7098,3580.75 7098,3698.17 7132.94,3733.11 7132.94,3899.79 7083.86,3948.87 7083.86,4179.35 7103.91,4199.4 7103.91,4200.3 7116.11,4212.5 v1(7154.38,4212.5) ; v1(7192.75,2927.76) 7192.75,2924.75 7202.5,2915 C771.1@7270,2915 ; C301.1@7300,3090 v1(7300,3145.48) ; 7454.56,3081.4 7473.16,3100 R1319.1@7560,3100 ; v1(8816.9,2654.03) 8927.63,2654.03 9015.15,2566.51 ; C728.1@2990,2836.62 C907.1@3150,2836.62
  Bottom Layer w15: R1570.2@2120,6380 2120,6382.16 2784.47,6382.16 2825,6422.69 2825,6560.64 2859.36,6595 R1849.2@2960,6595 2996.52,6595 3108.67,6482.84 3338.77,6482.84 3359.22,6503.3 3359.22,6504.11 3370.91,6515.8 3440.66,6515.8 3510,6446.47 R1848.2@3510,6385 3510,6383.79 3461,6383.79 3443.99,6366.78 3443.99,6235 v1(3467.68,6211.31) ; v1(3295.78,2758.33) 3331.61,2722.5 3650,2722.5 3690,2762.5 4851.64,2762.5 4956.46,2657.68 5140.71,2657.68 5331.84,2848.81 5652.83,2848.81 5753.23,2748.41 6126.03,2748.41 6259.12,2615.32 6364.5,2615.32 6477.48,2728.3 6950.43,2728.3 7018.52,2796.38 7125.12,2796.38 7190.41,2861.66 7190.41,2925.42 v1(7192.75,2927.76) ; v1(3516.34,6096.76) 3478.9,6059.33 3478.9,5643.88 3537.78,5585 R1843.2@3600,5585 3891.92,5585 ; v1(4032.46,6290.43) 4047.76,6275.13 4096.13,6275.13 4136,6315 R1852.2@4140,6315 4140,6281.05 4161.92,6259.13 4320.6,6259.13 4341.03,6279.55 4520.31,6279.55 ; v1(4032.74,5888.14) 4032.74,5837.98 3891.92,5697.17 3891.92,5585 ; R2294.2@4040,5420 4040,5458.14 3913.93,5584.22 3891.92,5584.22 3891.92,5585 ; R2298.2@4520,6380 4520,6279.86 4520.31,6279.55 ; R2307.2@4590,6950 4643.86,6950 4679.35,6914.5 4777.5,6914.5 4777.5,6914.27 4835.37,6914.27 4837.32,6916.22 4837.81,6916.22 4839.87,6914.16 ; R2302.2@4910,6950 4875.71,6950 4839.87,6914.16 ; R1851.2@4990,4855 5147.74,4855 ; R2312.2@5020,6030 5017.5,6030 5017.27,6030.23 4947.79,6030.23 4947.79,6038.15 ; v1(5223.23,5728.68) 5093.28,5728.68 4923.88,5898.08 4923.88,5973.75 4943.17,5993.03 4943.17,6033.52 4947.79,6038.15 ; v1(5237.77,5636.43) 5182.5,5581.15 5182.5,5377.85 5127.93,5323.29 5127.93,5037.11 5148.1,5016.94 5148.1,4859.49 5147.74,4859.49 5147.74,4855 ; R1548.2@5490,7400 5490,7363.42 5468.73,7342.15 5350.5,7342.15 5333.48,7325.12 5333.48,6952.58 ; R2394.1@5820,6520 5820,6482.5 5822.75,6479.75 5875,6427.5 6068.09,6427.5 6124.13,6483.55 6124.13,6520 6124.44,6520 ; R2395.1@6180,6520 6124.44,6520 ; R2384.1@6500,6520 6500,6482.5 6518.21,6464.29 6821.02,6464.29 6837.5,6480.78 R2391.1@6837.5,6520 ; R2388.1@6520,6890 R2388.1@6518.67,6890 ; R2391.1@6840,6520 R2391.1@6837.5,6520 ; R2387.1@6860,6910 6860,6832.2 6856.5,6828.7 6856.5,6779.27 ; v1(7035.75,3145.48) v1(7300,3145.48) 7366.2,3145.48 7420.29,3091.4 7792.21,3091.4 7835.59,3048.02 8479.81,3048.02 8816.9,2710.93 v1(8816.9,2654.03) ; v1(7154.38,4212.5) 7091.35,4212.5 7059.31,4244.54 6940.42,4244.54 6875.78,4309.18 6701.24,4309.18 6638.02,4372.4 5860.38,4372.4 5587.77,4645 R1850.2@5530,4645 5490.2,4645 5461.18,4674.02 5332.97,4674.02 5149.87,4857.13 5147.74,4855 ; R2386.1@7200,6900 7200.85,6900 7200.85,6846.91 ; R2393.1@7480,6490 7477.5,6490 7445.13,6457.63 7224.87,6457.63 7200,6482.5 R2392.1@7200,6520 7149.23,6520 7135.73,6533.5 7135.73,6797.71 ; R2385.1@7570,6900 R2385.1@7567.5,6900 ; R1564.2@8250,7080 8231.74,7080 8212.06,7099.68 8212.06,7350 ; R1579.2@8280,7350 8212.06,7350 ; 4520.31,6279.55 4642.35,6279.55 4659.5,6262.41 4873.48,6262.41 ; 4839.87,6914.16 4847.27,6906.76 4847.27,6699.79 ; 4847.27,6699.79 5260.78,6699.79 5333.48,6772.49 5333.48,6952.58 ; 4847.27,6699.79 4847.27,6523.71 v1(4878.02,6492.96) 4878.02,6266.95 4873.48,6262.41 ; 4873.48,6262.41 4873.48,6138.23 4947.79,6063.92 4947.79,6038.15 ; 5333.48,6952.58 5336.06,6950 R1523.2@5395,6950 5390.93,6945.93 5390.93,6912.82 5398.38,6905.37 5774.63,6905.37 5790,6890 R2390.1@5830,6890 5830,6878.39 5893.63,6814.76 5935.03,6814.76 5977.89,6857.63 6087.93,6857.63 6120.31,6890 R2389.1@6190,6890 6190,6825.93 6182.2,6818.13 6182.2,6772.17 ; 6124.44,6520 6124.44,6730.19 6166.41,6772.17 6182.2,6772.17 ; 6182.2,6772.17 6267.53,6772.17 6268.09,6772.73 6347.39,6772.73 6464.66,6890 R2388.1@6518.67,6890 ; R2388.1@6518.67,6890 6518.67,6841.54 6640.21,6720 6775.96,6720 ; 6775.96,6720 6775.96,6550.63 6806.59,6520 R2391.1@6837.5,6520 ; 6775.96,6720 6778.77,6720 6830.96,6772.2 6849.43,6772.2 6856.5,6779.27 ; 6856.5,6779.27 6864.07,6771.7 6912.81,6771.7 6938.83,6797.71 7135.73,6797.71 ; 7135.73,6797.71 7135.73,6828.08 7154.56,6846.91 7200.85,6846.91 ; 7200.85,6846.91 7244.7,6846.91 7273.46,6818.15 7273.46,6789.04 7310.94,6751.56 7441.24,6751.56 7567.5,6877.82 R2385.1@7567.5,6900 ; R2385.1@7567.5,6900 7556.94,6900 7528.29,6928.65 7528.29,7033.47 7526.53,7035.23 7526.53,7129.9 7547.12,7150.48 7547.12,7195.15 7579.47,7227.5 7616.76,7227.5 7644.16,7254.9 7917.03,7254.9 7993.11,7330.98 8139.98,7330.98 8159.01,7350 8212.06,7350
  Bottom Layer w20: R1500.2@1710,7400 1710,7385.44 1797.52,7297.92 2085,7297.92 ; R1570.2@2120,6380 1988.43,6380 1978.43,6390 R1498.2@1710,6390 1692.33,6390 1656.35,6425.98 1656.35,6811.84 1734.51,6890 R1499.2@1790,6890 1905.53,6890 1985.45,6810.08 2070.43,6810.08 2129,6868.65 R1571.2@2129,6890 ; TP410.1@2120,7360 TP410.1@2120.59,7359.41 ; R1571.2@2130,6890 R1571.2@2129,6890 ; R1578.2@2230,7390 2151.17,7390 TP410.1@2120.59,7359.41 ; R1577.2@5620,6400 5689.6,6400 5769.35,6479.75 5822.75,6479.75 ; 2085,7297.92 2085,7323.83 TP410.1@2120.59,7359.41 ; 2085,7297.92 2085,6909.26 2104.26,6890 R1571.2@2129,6890
VREF+: C911.1 R1103.1 R1104.1 R1105.1 R1106.1 R1243.2 R1388.2 R1661.1 R2054.1 R2055.1 R2056.1 R2063.1 R2064.1 R2065.1 R2066.1 R2067.1 R2068.1 R2069.1 R2083.1 R2377.2 R2378.2 R2521.1 TP411.1 TP679.1 TP683.1 U9.2 | length 13205.3
  Top Layer w10: v1(3924.42,5662.09) 3924.42,6942.45 3947.9,6965.93 3947.9,6967.61 3960,6979.71 R1661.1@3960,7060 ; v1(4473.41,5592.35) 4468.5,5592.35 4468.5,5264.4 4565.34,5167.56 4565.34,5103.66 4569,5100 R2056.1@4570,5100 ; v1(5812.82,5446.12) 5795.18,5428.48 5795.18,4999.73 5890,4904.9 5890,4877.51 ; C911.1@5909.76,4310 5962.49,4310 5962.49,4356.5 5963,4357 5963,4378.48 5957.43,4384.05 5957.43,4445.93 5985,4473.5 R1105.1@5985,4520 R1106.1@5985,4630 ; U9.2@6037.4,4839.92 6037.4,4865 6022.38,4880.02 5892.51,4880.02 5890,4877.51 ; R1104.1@6075,4520 R1103.1@6075,4630 R1106.1@5985,4630 ; v1(6392.53,5516.41) 6392.53,5522.53 6400,5530 R2064.1@6400,5560 ; v1(6613,4150) R2066.1@6660,4150 ; v1(7446.6,5671.68) 7412.5,5637.58 7412.5,5330.05 7446.76,5295.79 7446.76,5209.83 7452.5,5204.09 ; R2063.1@7480,4930 7480,4960 7490,4970 R2083.1@7490,5000 7459.39,5000 7452.5,5006.89 7452.5,5204.09 ; R2521.1@7490,5200 7490,5200.64 7455.95,5200.64 7452.5,5204.09 ; v1(8562.68,5890.9) 8577.61,5890.9 8590,5903.29 R2069.1@8590,5930 ; v1(8830.19,5849.18) 8909.39,5849.18 8961.58,5901.37 8961.58,6910 8959.24,6910 ; R2378.2@8910,6910 8959.24,6910 ; R1388.2@8960,7540 8960,7513.39 8977.39,7496 8977.39,6928.15 8959.24,6910 ; 5890,4877.51 R1243.2@5890,4720 5890,4704.05 5921.95,4672.11 5946.89,4672.11 5985,4634 R1106.1@5985,4630
  Bottom Layer w10: v1(3924.42,5662.09) 3924.42,5662.72 4134.47,5662.72 4177.19,5620 4445.76,5620 v1(4473.41,5592.35) 4473.41,5605.23 4488.18,5620 R2055.1@4520,5620 4608.41,5620 4651.23,5662.82 TP683.1@4940,5662.82 ; TP683.1@4940,5660 TP683.1@4940,5662.82 ; v1(5948.33,4218.09) 5948.33,4213.78 5954.18,4213.78 5978.24,4189.72 6236.93,4189.72 6262.47,4215.25 6534.49,4215.25 6599.74,4150 v1(6613,4150) ; R2377.2@8390,5840 8441.11,5840 ; v1(8562.68,5890.9) 8562.68,5847.52 ; v1(8830.19,5849.18) 8830.19,5815.65 8816.06,5801.52 8580.29,5801.52 8562.68,5819.12 8562.68,5847.52 ; TP683.1@4940,5662.82 5016.44,5662.82 5049.23,5695.61 5451.36,5695.61 5476.97,5670 R2054.1@5500,5670 5500,5642.97 5525.35,5617.62 5749.94,5617.62 5772.75,5594.81 5772.75,5509.03 5791.78,5490 R2068.1@5830,5490 5830,5460 5816.12,5446.12 v1(5812.82,5446.12) 5812.82,5370.9 5860.03,5323.69 6021.31,5323.69 6032.5,5312.5 6284.83,5312.5 6392.53,5420.2 v1(6392.53,5516.41) 6411.41,5516.41 TP679.1@6485,5590 6485,5593.03 6511.97,5620 R2067.1@6570,5620 6570,5651.9 6603.34,5685.23 6801.25,5685.23 6856.48,5630 R2065.1@6890,5630 7130.16,5630 7195.16,5695 7423.28,5695 v1(7446.6,5671.68) 7539.99,5671.68 7546.48,5678.18 7966.82,5678.18 TP411.1@8015,5630 8419.41,5630 8441.11,5651.7 8441.11,5840 ; 8441.11,5840 8555.16,5840 8562.68,5847.52
VREF-: C912.2 R1107.1 R1108.1 R1109.1 R1110.1 R1245.2 R1812.1 R1813.1 R1814.1 TP830.1 U7.3 | length 1434.5
  Top Layer w10: R1109.1@4925,4380 R1110.1@4925,4490 ; C912.2@5050.24,4180 5050.24,4190 5050.24,4216.5 5034.04,4216.5 5034.04,4232.7 5034.04,4322.54 5035,4323.5 5035,4370 R1108.1@5035,4380 R1107.1@5035,4490 R1110.1@4925,4490 ; R1812.1@5130,4880 5130,4799.84 5091.66,4761.5 5090.34,4761.5 5087.5,4758.66 U7.3@5060,4758.66 5021.04,4758.66 v1(4965.85,4703.47) 4915.97,4703.47 4850,4637.5 R1245.2@4850,4600 4850,4562.5 4861.13,4551.37 4900.22,4551.37 4925,4526.59 R1110.1@4925,4490
  Bottom Layer w10: v1(4965.85,4703.47) 4972.02,4709.64 4972.02,4714.68 4998.12,4740.78 5010,4740.78 R1814.1@5010,4740 5026.55,4740 5076.55,4690 R1813.1@5100,4690 5100,4685 TP830.1@5180,4685
XSIG020411: R1242.2 R1243.1 TP831.1 U9.1 | length 291.7
  Top Layer w10: U9.1@5962.6,4839.92 5962.6,4793.36 v1(5975,4780.96) 5970,4780.96 R1243.1@5970,4720 R1242.2@6060,4720
  Bottom Layer w10: TP831.1@5910,4765 5959.04,4765 v1(5975,4780.96)
XSIG020421: R1244.2 R1245.1 TP832.1 U7.1 | length 284.2
  Top Layer w10: R1245.1@4930,4600 4970.06,4600 ; v1(4970.52,4643.47) 4970.52,4600.46 4970.06,4600 ; U7.1@5022.6,4679.92 5022.6,4602.6 R1244.2@5020,4600 4970.06,4600
  Bottom Layer w10: v1(4970.52,4643.47) 4991.73,4622.25 4992.75,4622.25 TP832.1@5020,4595
XSIG020506: D49.1 R2078.1 | length 76.5
  Top Layer w10: R2078.1@10480,6100 D49.1@10480,6176.5
XSIG020896: C528.1 C919.1 R1210.2 R1211.2 TP409.1 U8.2 U8.3 | length 627.4
  Top Layer w10: C528.1@2720,3160 2745.61,3160 2757.25,3148.37 v1@2757.25,3134.75 ; v1(2757.25,3123.7) v1@2757.25,3134.75 ; U8.3@2785,3060 2785,3096.41 2795.02,3106.42 2805.29,3106.42 ; U8.2@2835,3060 2835,3097.26 2825.83,3106.42 2805.29,3106.42 ; R1210.2@2890,3150 R1211.2@2810,3150 R1211.2@2810,3147.51 ; v1@2757.25,3134.75 2770.01,3147.51 R1211.2@2810,3147.51 ; 2805.29,3106.42 2810,3111.13 R1211.2@2810,3147.51
  Top Layer w30: R1210.2@2890,3150 2912.17,3150 2972.17,3210 C919.1@3019.76,3210
  Bottom Layer w10: v1(2757.25,3123.7) 2786.3,3123.7 TP409.1@2830,3080
XSIG021084: D10.3 R2729.2 TP1896.1 | length 182.7
  Bottom Layer w10: D10.3@4096.5,555 4096.5,445 R2729.2@4090,445 4105,430 TP1896.1@4150,430
XSIG021089: D12.3 R2728.2 TP1897.1 | length 206.2
  Bottom Layer w10: D12.3@4306.5,555 4304.73,555 4304.73,518.14 4275,488.42 R2728.2@4275,445 4280,450 TP1897.1@4355,450
XSIG021092: D13.3 R2730.2 TP1898.1 | length 180
  Bottom Layer w10: D13.3@3710,728.5 3778,728.5 ; TP1898.1@3785,680 3785,715.89 3778,722.89 3778,728.5 ; R2730.2@3825,760 3825,759 3794.5,728.5 3778,728.5
XSIG021093: D11.3 R2731.2 TP1884.1 | length 282.6
  Bottom Layer w10: R2731.2@3460,755 3447.05,742.05 3447.05,669.34 3461.39,655 TP1884.1@3550,655 3551.58,655 3551.58,710.08 D11.3@3570,728.5
XSIG030714: R1.2 TP834.1 U1.34 | length 1450.8
  Top Layer w9: 5938.64,1599.98 5979.88,1558.74 6040,1558.74 U1.34@6074.88,1558.74
  Top Layer w10: v1(5021.28,2018.48) 5116.14,2018.48 5267.34,1867.28 5765.81,1867.28 5888.93,1744.16 5888.93,1649.69 5938.64,1599.98
  Bottom Layer w10: R1.2@4940,2080 5016.88,2080 5021.28,2075.6 TP834.1@5025,2079.31 ; v1(5021.28,2018.48) 5025,2022.2 TP834.1@5025,2079.31 ; TP834.1@5025,2080 TP834.1@5025,2079.31
XSIG030715: R2.2 TP835.1 U1.33 | length 1368.2
  Top Layer w9: 5910.34,1657.02 5910.34,1655.86 5987.77,1578.43 6040,1578.43 U1.33@6074.88,1578.43 6118.88,1578.43 6123.7,1583.24 6123.7,1584.55 v1(6144.56,1605.41)
  Top Layer w10: v1(5185.74,1994.73) 5293.18,1887.28 5775.72,1887.28 5910.34,1752.67 5910.34,1657.02
  Bottom Layer w10: v1(5185.74,1994.73) 5185.74,2032.73 5190,2036.99 R2.2@5190,2080 ; TP835.1@6080,1565 6120.41,1605.41 v1(6144.56,1605.41)
XSIG030716: R3.2 TP836.1 U1.32 | length 1183.4
  Top Layer w9: 5930.34,1666.46 5930.34,1662.73 5994.96,1598.11 6040,1598.11 U1.32@6074.88,1598.11
  Top Layer w10: v1(5346.75,1958.4) 5397.86,1907.28 5784.01,1907.28 5930.34,1760.95 5930.34,1666.46
  Bottom Layer w10: TP836.1@5285,1930 5318.35,1930 v1(5346.75,1958.4) 5342.11,1958.4 5299.87,2000.63 5299.87,2064.88 5314.99,2080 R3.2@5340,2080
XSIG030717: R4.2 TP837.1 U1.31 | length 1219.1
  Top Layer w9: 5950.34,1674.74 5950.34,1669.6 6002.14,1617.8 6040,1617.8 U1.31@6074.88,1617.8
  Top Layer w10: R4.2@5190,2080 5232.89,2080 5240.75,2072.14 5240.75,2014.39 v1(5255,2014.39) 5337.53,2014.39 5424.64,1927.28 5792.29,1927.28 5950.34,1769.24 5950.34,1674.74
  Bottom Layer w10: v1(5255,2014.39) TP837.1@5255,2065
XSIG030718: R5.2 TP838.1 U1.30 | length 1058.2
  Top Layer w9: 5970.38,1682.98 5970.38,1676.43 6009.33,1637.48 6040,1637.48 U1.30@6074.88,1637.48
  Top Layer w10: R5.2@5340,2080 5340,2040.41 5375.41,2005 v1(5402.68,2005) 5460.4,1947.28 5800.58,1947.28 5970.38,1777.48 5970.38,1682.98
  Bottom Layer w10: TP838.1@5345,2005 v1(5402.68,2005)
XSIG030719: R6.2 TP839.1 U1.29 | length 895.7
  Top Layer w9: 5990.38,1691.27 5990.38,1683.3 6016.51,1657.17 6040,1657.17 U1.29@6074.88,1657.17
  Top Layer w10: v1(5505.15,2031.54) 5569.41,1967.28 5808.86,1967.28 5990.38,1785.76 5990.38,1691.27
  Bottom Layer w10: TP839.1@5460,1995 5496.54,2031.54 v1(5505.15,2031.54) 5500,2036.69 R6.2@5500,2080
XSIG030720: R7.2 TP840.1 U1.28 | length 869.8
  Top Layer w9: 6010.38,1712.35 6010.38,1690.17 6023.7,1676.85 6040,1676.85 U1.28@6074.88,1676.85
  Top Layer w10: R7.2@5500,2080 5538.81,2080 v1(5561.41,2057.4) 5631.53,1987.28 5817.14,1987.28 6010.38,1794.05 6010.38,1712.35
  Bottom Layer w10: TP840.1@5550,1995 5550,2045.99 v1(5561.41,2057.4)
XSIG030721: R8.2 TP841.1 U1.27 | length 695.8
  Top Layer w9: 6030.38,1752.04 6030.38,1705.71 6030.88,1705.21 6030.88,1696.54 6040,1696.54 U1.27@6074.88,1696.54
  Top Layer w10: R8.2@5650,2080 5652.5,2080 v1(5711.42,2021.08) 5811.63,2021.08 6030.38,1802.33 6030.38,1752.04
  Bottom Layer w10: v1(5711.42,2021.08) 5715,2024.66 TP841.1@5715,2070
XSIG030722: R9.2 TP842.1 U1.20 | length 401.7
  Top Layer w9: 6242.08,1883.63 6242.2,1883.5 6242.2,1835 U1.20@6242.2,1785.12
  Top Layer w10: v1(6125.25,2018.13) 6124.77,2017.65 6124.77,2016.97 6242.08,1899.67 6242.08,1883.63
  Bottom Layer w10: R9.2@6120,2080 6120,2022.43 v1@6124.77,2017.65 ; v1(6125.25,2018.13) v1@6124.77,2017.65 ; TP842.1@6130,1965 6130,2012.43 v1@6124.77,2017.65
XSIG030723: R10.2 TP843.1 U1.21 | length 519.9
  Top Layer w9: 6073.91,1991.68 6109.97,1991.68 6222.52,1879.13 6222.52,1835 U1.21@6222.52,1785.12
  Top Layer w10: R10.2@5960,2080 5960,2042.19 v1(6011.38,1990.81) 6012.25,1991.68 6073.91,1991.68
  Bottom Layer w10: TP843.1@5960,2005 5997.19,2005 v1(6011.38,1990.81)
XSIG030724: R11.2 TP844.1 U1.22 | length 636.2
  Top Layer w9: 6173.55,1896.79 6202.83,1867.5 6202.83,1835 U1.22@6202.83,1785.12
  Top Layer w10: R11.2@5800,2080 5837.56,2080 5884.67,2032.9 v1(5884.67,2020.41) 5959.81,1945.26 6125.08,1945.26 6173.55,1896.79
  Bottom Layer w10: TP844.1@5870,2070 5884.67,2055.33 v1(5884.67,2020.41)
XSIG030725: R12.2 TP845.1 U1.23 | length 632.8
  Top Layer w9: 5941.06,1921.59 6118.21,1921.59 6183.15,1856.65 6183.15,1835 U1.23@6183.15,1785.12
  Top Layer w10: v1(5844.67,2030.47) 5844.67,2017.98 5941.06,1921.59
  Bottom Layer w10: TP845.1@5800,1975 5844.67,2019.67 v1(5844.67,2030.47) 5844.67,2037.83 5802.5,2080 R12.2@5800,2080
XSIG030726: R13.2 TP846.1 U1.16 | length 399.2
  Top Layer w9: U1.16@6320.94,1785.12 6320.94,1835 6320.94,1891.43 v1(6381.98,1952.47)
  Top Layer w10: v1(6381.98,1952.47) 6420,1990.49 R13.2@6420,2080
  Bottom Layer w10: v1(6381.98,1952.47) 6381.98,1961.98 TP846.1@6420,2000
XSIG030727: R14.2 TP847.1 U1.17 | length 463.5
  Top Layer w9: U1.17@6301.26,1785.12 6301.26,1835 6301.26,1898.62 6314.05,1911.41 6314.05,1938.56
  Top Layer w10: 6314.05,1938.56 6314.05,2005.02 v1(6364.08,2055.04)
  Bottom Layer w10: TP847.1@6310,1980 6342.86,2012.86 6342.86,2033.83 v1(6364.08,2055.04) 6364.08,2061.58 6382.5,2080 R14.2@6420,2080
XSIG030728: R15.2 TP848.1 U1.18 | length 355.9
  Top Layer w9: v1(6266.97,2016.37) 6266.97,1963.11 6281.57,1948.5 6281.57,1835 U1.18@6281.57,1785.12
  Top Layer w10: v1(6266.97,2016.37) 6270,2019.4 R15.2@6270,2080
  Bottom Layer w10: TP848.1@6220,2000 6236.37,2016.37 v1(6266.97,2016.37)
XSIG030729: R16.2 TP849.1 U1.19 | length 506.7
  Top Layer w9: 6260.32,1939.68 6261.89,1938.11 6261.89,1835 U1.19@6261.89,1785.12
  Top Layer w10: v1(6040.3,2116.59) 6076.89,2080 R16.2@6120,2080 6122.5,2080 6250,1952.5 6250,1950 6260.32,1939.68
  Bottom Layer w10: TP849.1@6040,2060 6040,2116.28 v1(6040.3,2116.59)
XSIG030815: R17.1 TP850.1 U1.38 | length 209.5
  Top Layer w9: v1(6009.11,1493.44) 6022.55,1480 6040,1480 U1.38@6074.88,1480
  Bottom Layer w10: TP850.1@5970,1450 5991.21,1450 6009.11,1467.9 ; v1(6009.11,1493.44) 6009.11,1467.9 ; R17.1@6070,1470 6070,1466.36 6009.11,1466.36 6009.11,1467.9
XSIG030816: C21.1 TP851.1 U1.37 | length 331.5
  Top Layer w9: U1.37@6074.88,1499.68 6219.87,1499.68 v1(6247.19,1527)
  Bottom Layer w10: TP851.1@6245,1380 C21.1@6245,1470 6245,1524.81 v1(6247.19,1527)